# Altium PCB hd-gs-alt.PcbDoc
Units mil, origin at the board's own origin, x right, y up, seen from the top; angles counter-clockwise.
Board outline 1400 x 650 mil, 6 copper layers (Top, 2-GND, 3-SIG, 4-SIG, 5-GND, Bottom), stack 46.142 mil thick; 54 components, 39 nets, 207 pads, 109 vias.
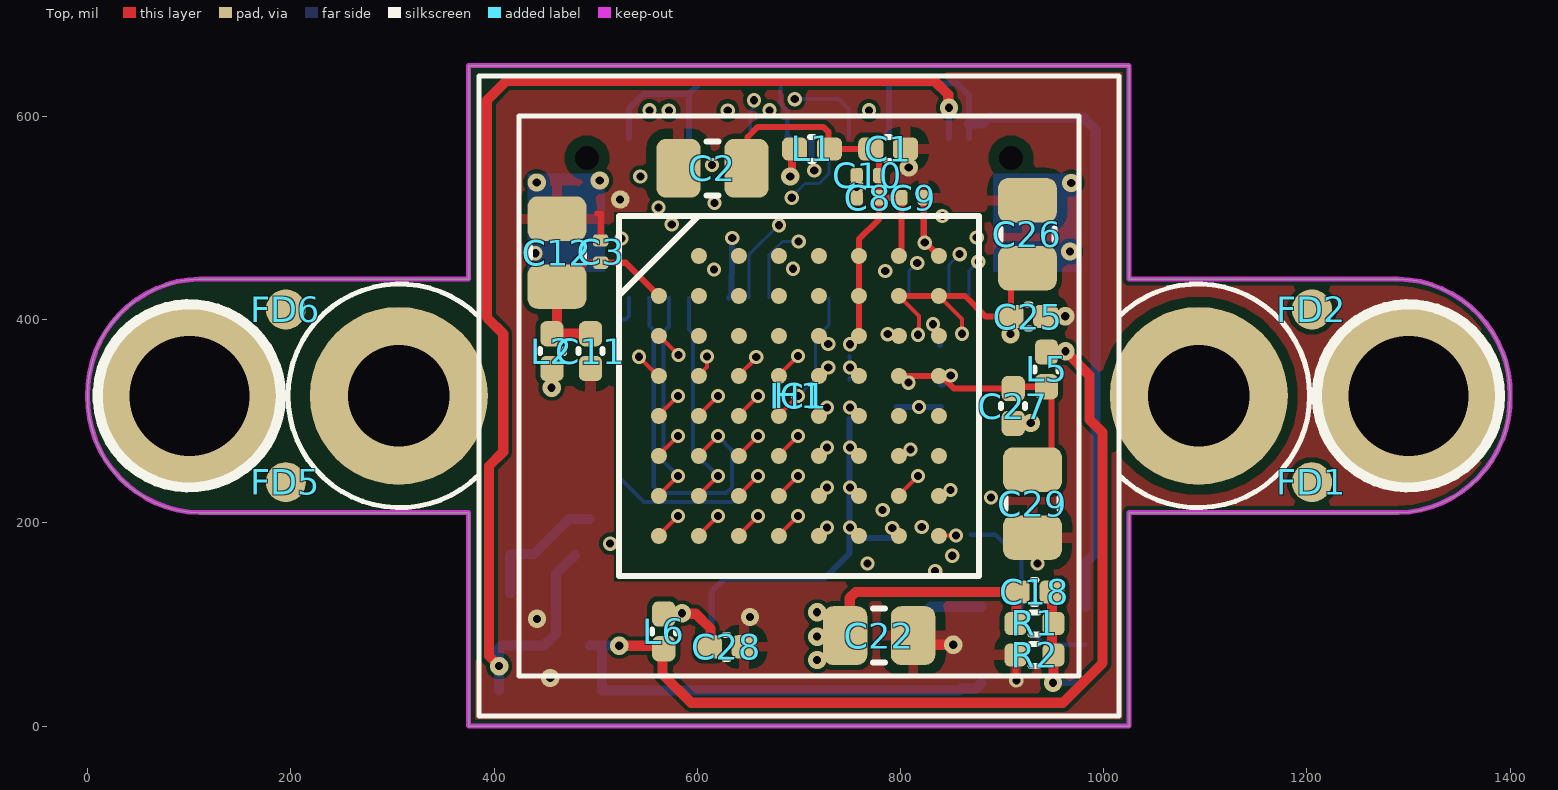
[diagram p0: Top view]
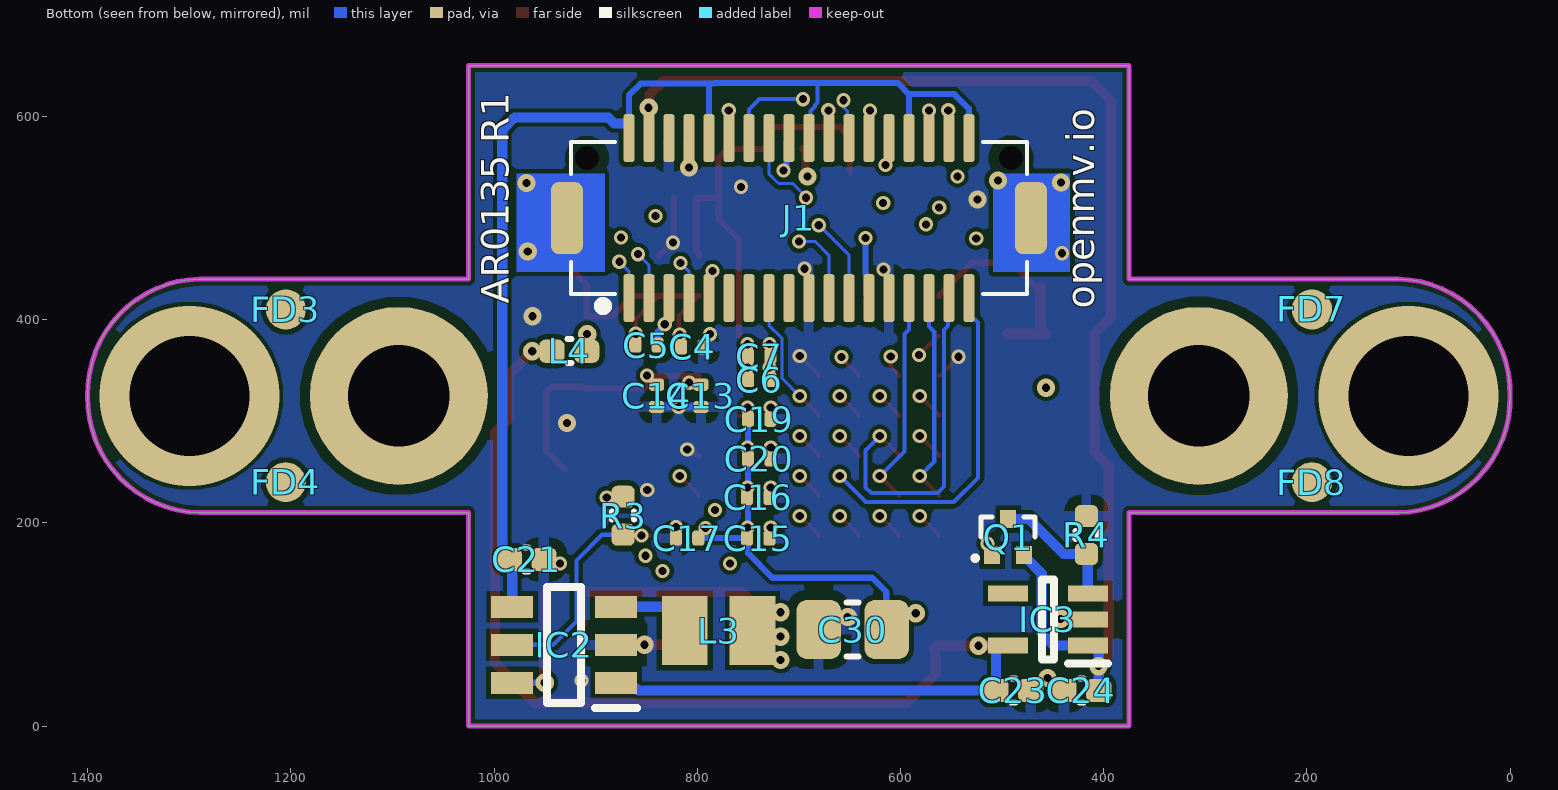
[diagram p1: Bottom view, seen from below]
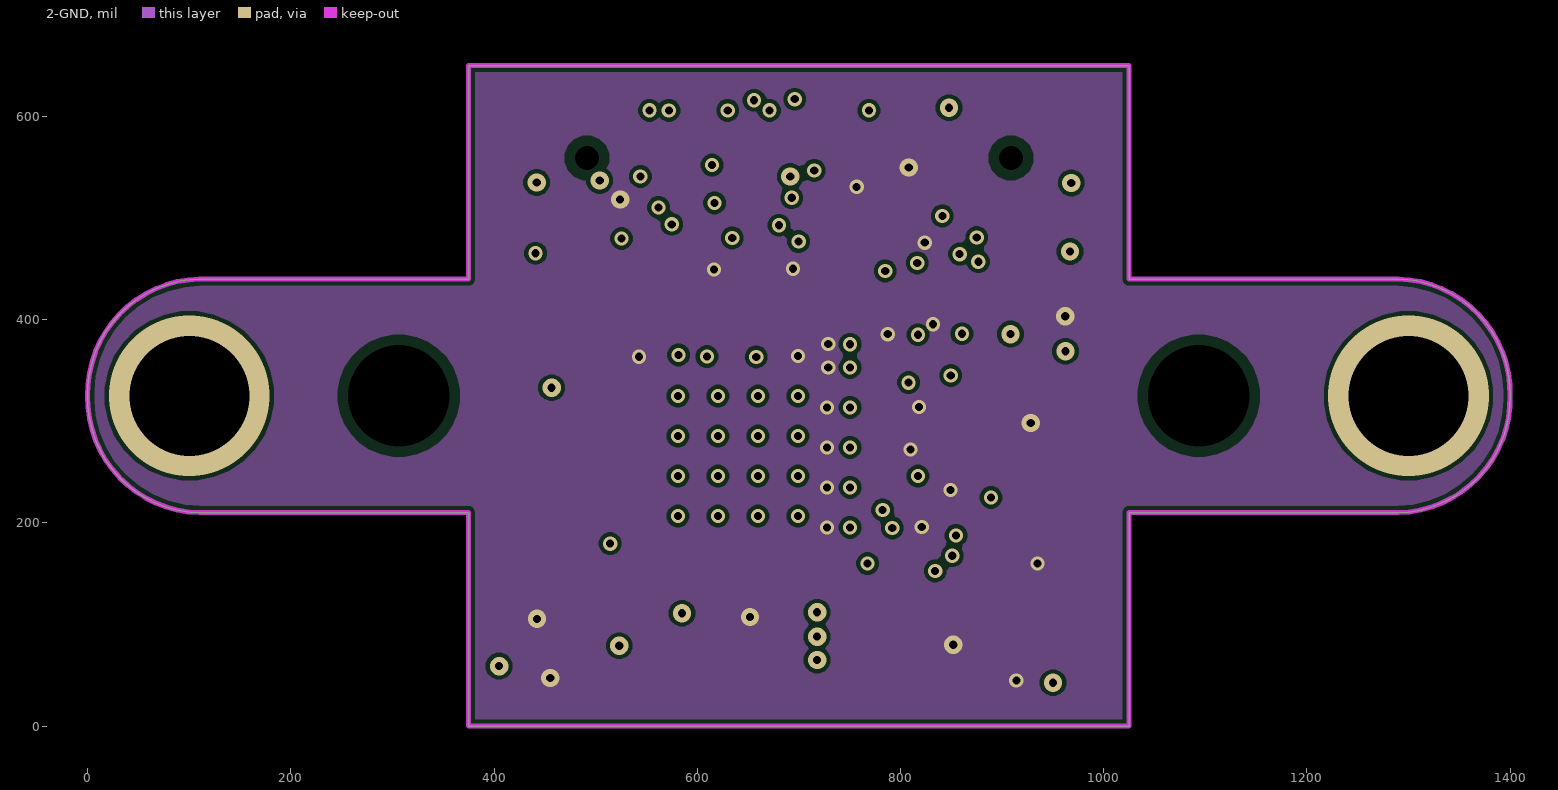
[diagram p2: 2-GND]
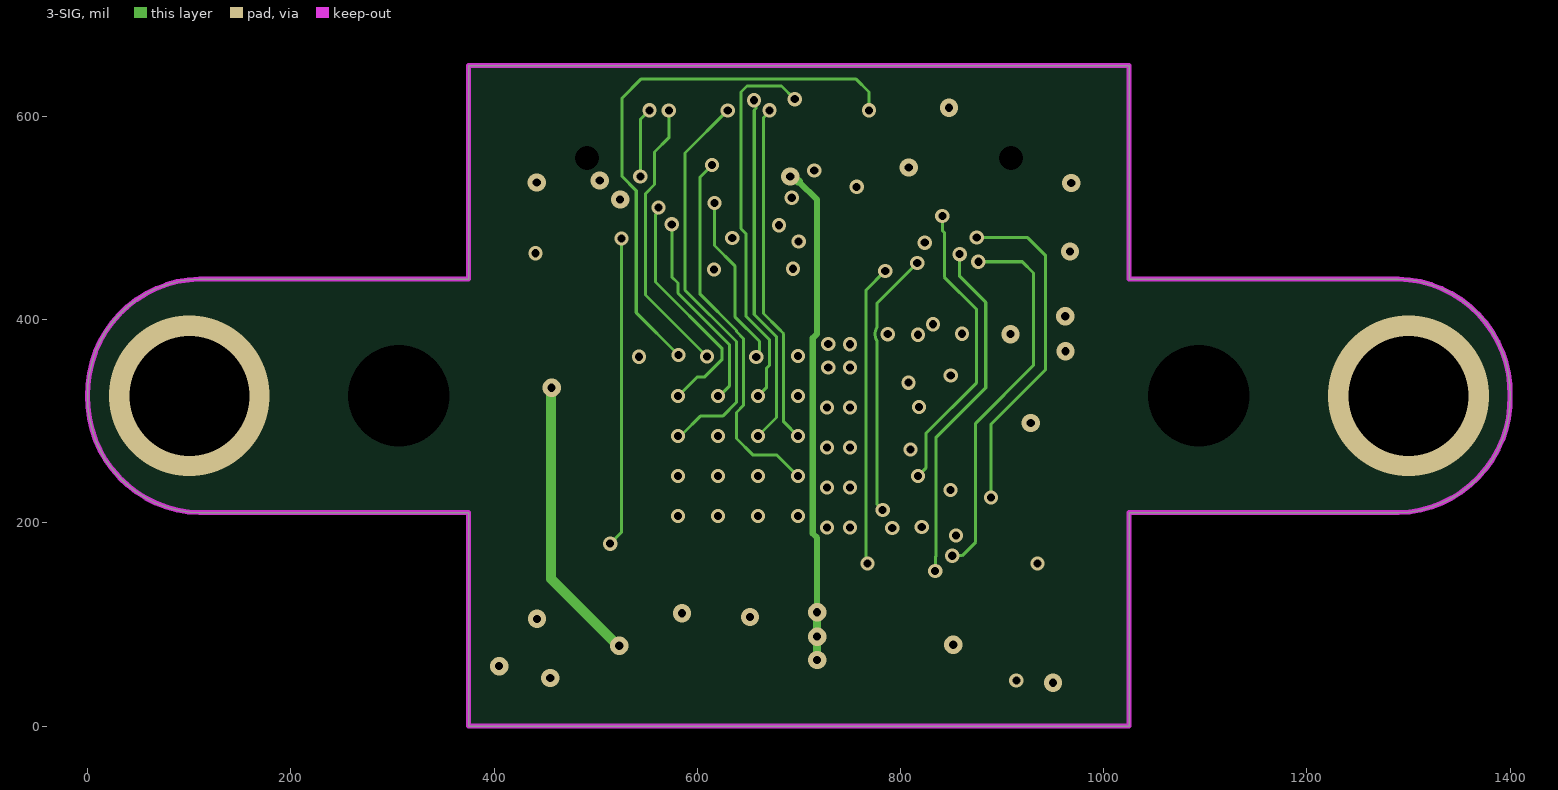
[diagram p3: 3-SIG]
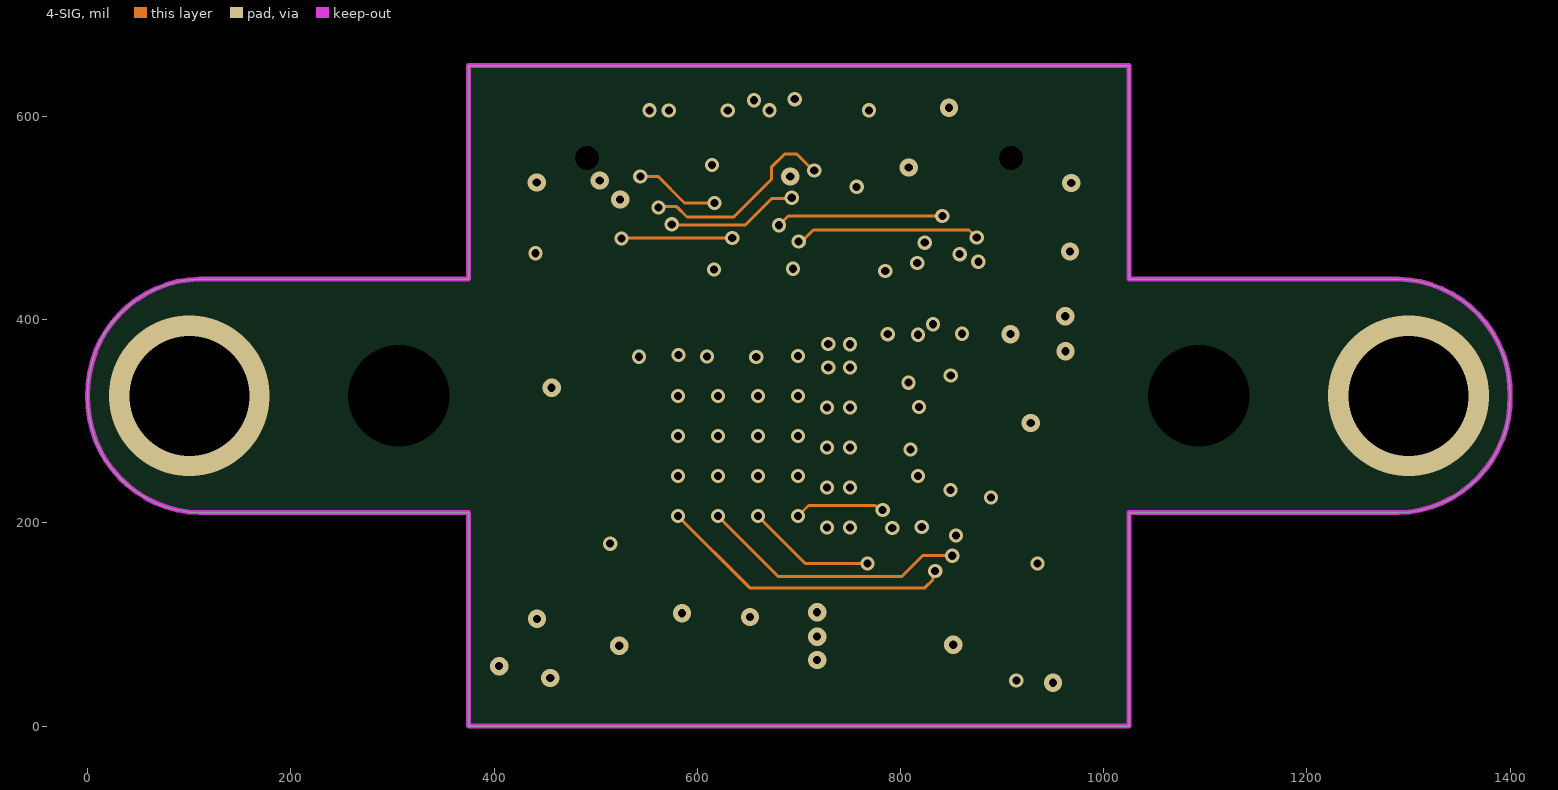
[diagram p4: 4-SIG]
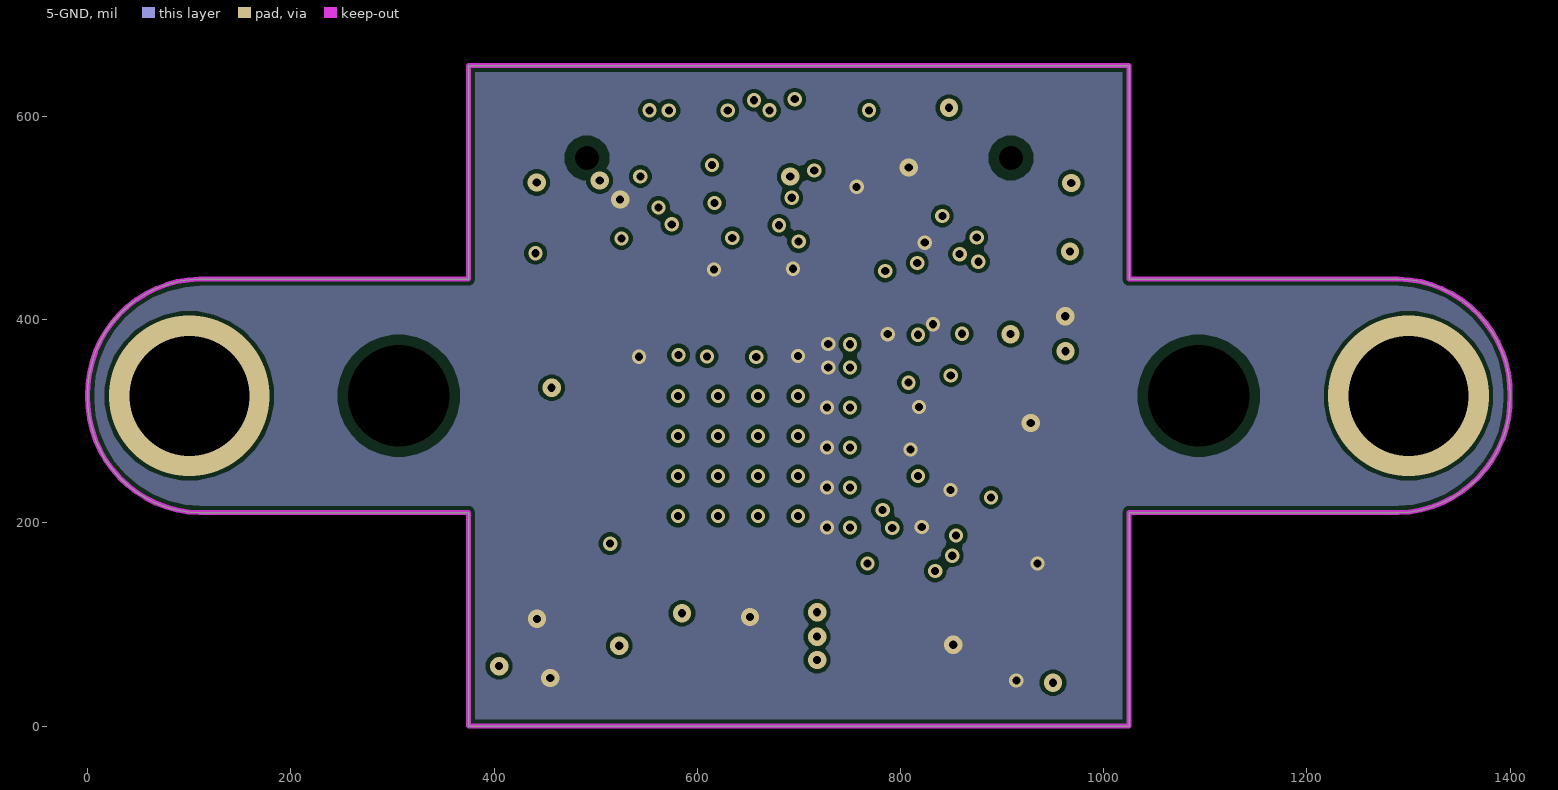
[diagram p5: 5-GND]
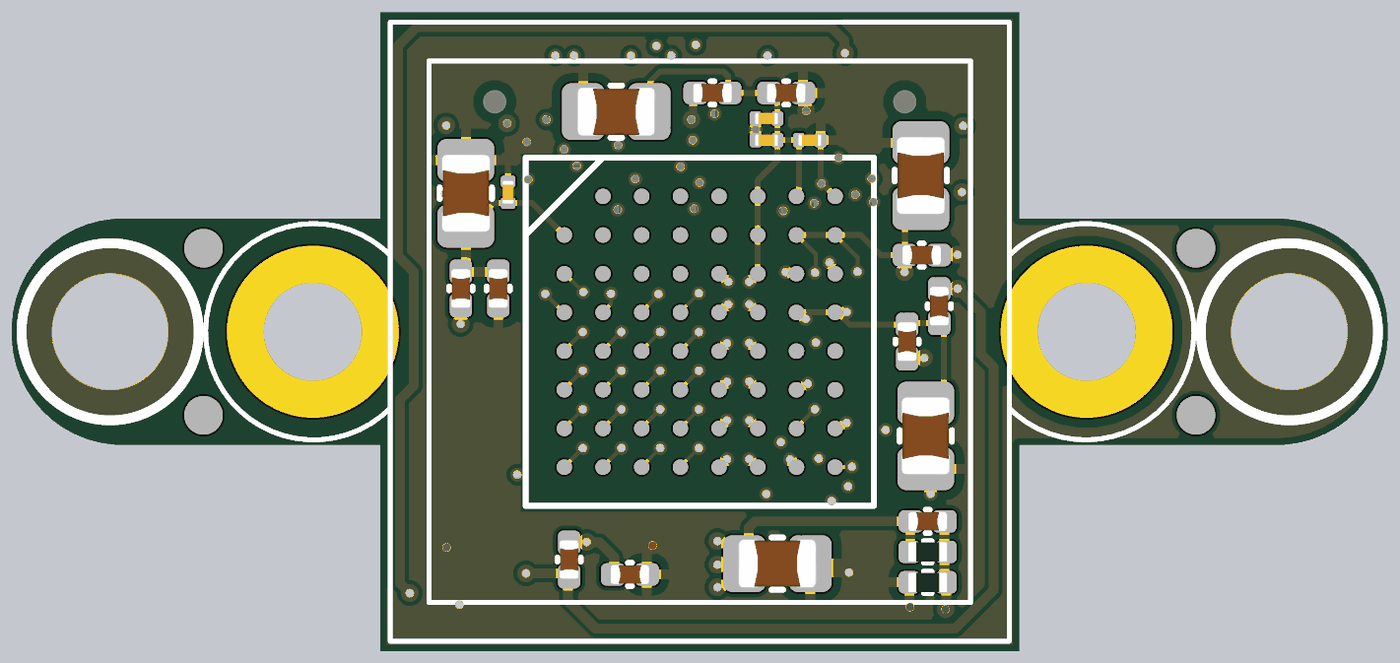
[diagram p6: 3D render of the assembled board from above, using the file's embedded part models]
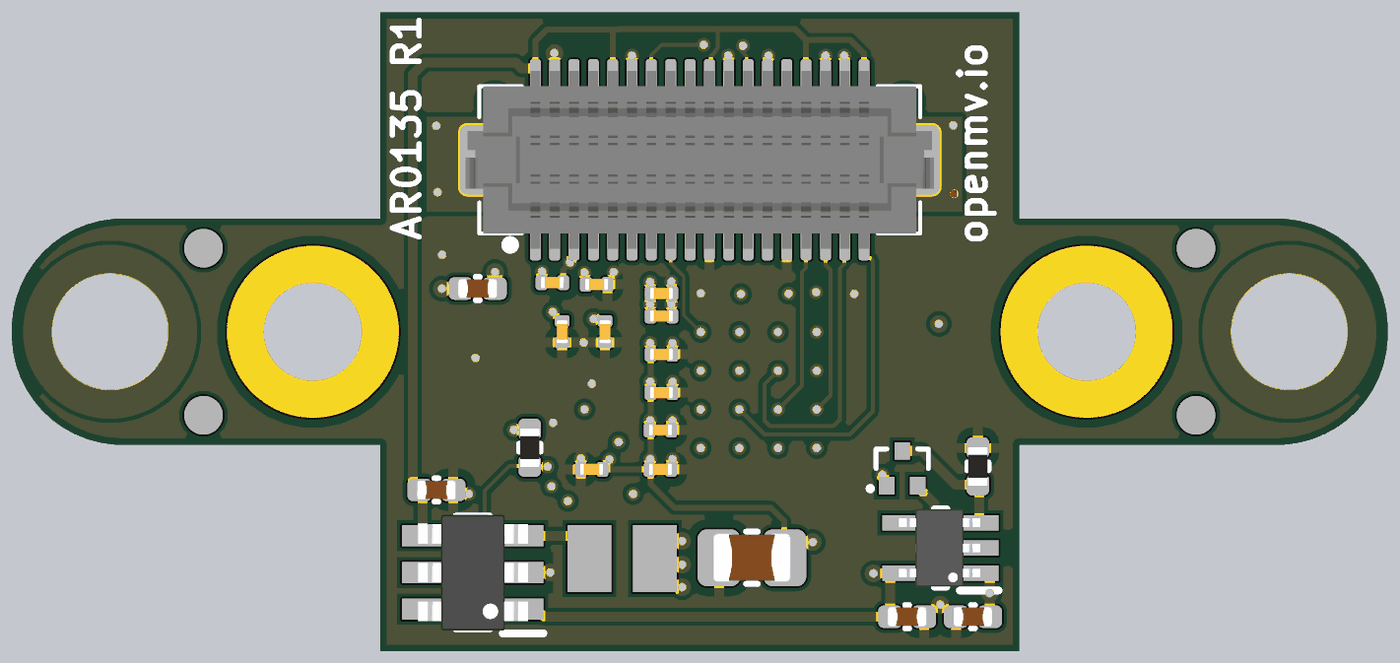
[diagram p7: 3D render of the assembled board from below, using the file's embedded part models]

## Layer stack, top to bottom
Top Solder: solder mask 0.4, Solder Resist, Dk 3.5
Top: signal copper 1.378
Dielectric 2: prepreg 5, PP-006, Dk 4.1
2-GND: signal copper 1.378
Dielectric 3: prepreg 10, PP-006, Dk 4.1
3-SIG: signal copper 1.378
Dielectric 1: dielectric 7.874, FR-4, Dk 4.8
4-SIG: signal copper 1.378
Dielectric 4: prepreg 10, PP-006, Dk 4.1
5-GND: signal copper 1.378
Dielectric 5: prepreg 5, PP-006, Dk 4.1
Bottom: signal copper 1.378
Bottom Solder: solder mask 0.4, Solder Resist, Dk 3.5

## Board outline
1290.03,210 1025.03,210 1025.03,0 375.03,0 375.03,210 110.03,210 cw(c112.53,322.5) 0.03,325 cw(c112.53,327.5) 110.03,440 375.03,440 375.03,650 1025.03,650 1025.03,440 1290.03,440 cw(c1287.53,327.5) 1400.03,325 cw(c1287.53,322.5)

## Design rules (kind name [scope] priority, off if disabled: settings)
BoardOutlineClearance mdCopperDimension [All] p1: gap=4 ignorepadtopadclearanceinfootprint=FALSE
Clearance [All] p1: gap=4 ignorepadtopadclearanceinfootprint=FALSE except(5: SMDPad-Fill SMDPad-Poly SMDPad-Region; 10: THPad-Fill THPad-Poly THPad-Region)
ComponentClearance ComponentClearance_1 [InComponent('H1')] p1: gap=0 collisioncheckmode=3 verticalgap=0 showdistances=FALSE
ComponentClearance [All] p2: gap=5 collisioncheckmode=3 verticalgap=5 showdistances=FALSE
HoleSize HoleSize_For_NetClass_signal [InNetClass('signal')] p1: absolutevalues=TRUE maxlimit=4 minlimit=4 maxpercent=80.000 minpercent=20.000
HoleSize HoleSize_For_NetClass_pwr [InNetClass('pwr')] p2: absolutevalues=TRUE maxlimit=4 minlimit=4 maxpercent=80.000 minpercent=20.000
HoleSize HoleSize_For_NetClass_gnd [InNetClass('gnd')] p3: absolutevalues=TRUE maxlimit=4 minlimit=4 maxpercent=80.000 minpercent=20.000
HoleSize [All] p4: absolutevalues=TRUE maxlimit=100000 minlimit=4 maxpercent=80.000 minpercent=20.000
HoleToHoleClearance mdDrill [All] p1: gap=3 allowstackedmicrovias=TRUE
MinimumSolderMaskSliver [All] p1 off: minsoldermaskwidth=10
PasteMaskExpansion Expansion_SMDPaste_OFF [InPadClass('SMDPaste_OFF')] p1: expansion=0
PasteMaskExpansion mlMinCreamFrame [All] p2: expansion=0
PolygonConnect [All] p1: thpad.connectstyle=Relief thpad.reliefconductorwidth=10 thpad.reliefentries=4 thpad.polygonreliefangle="90 Angle" thpad.airgapwidth=10 smdpad.connectstyle=Relief smdpad.reliefconductorwidth=10 smdpad.reliefentries=4 smdpad.polygonreliefangle="90 Angle" smdpad.airgapwidth=10 via.connectstyle=Direct via.reliefconductorwidth=10 via.reliefentries=4 via.polygonreliefangle="90 Angle" via.airgapwidth=10
RoutingVias [All] p1: holewidth=8 width=14 viastyle="Through Hole" minholewidth=8 minwidth=14 maxholewidth=100 maxwidth=100
SolderMaskExpansion mlMinStopFrame [All] p1: expansion=2 istentingtop=FALSE
Width [All] p1: maxlimit=196.85 minlimit=3 preferedwidth=3
25 further rules are at their usual default settings.

## Classes and differential pairs
pad class SMDPaste_OFF: FD1-1 FD2-1 FD3-1 FD4-1 FD5-1 FD6-1 FD7-1 FD8-1 J1-1 J1-2 J1-3 J1-4 J1-5 J1-6 J1-7 J1-8 J1-9 J1-10 J1-11 J1-12 J1-13 J1-14 J1-15 J1-16 J1-17 J1-18 J1-19 J1-20 J1-21 J1-22 J1-23 J1-24 J1-25 J1-26 J1-27 J1-28 J1-29 J1-30 J1-31 J1-32 J1-33 J1-34 J1-35 J1-36

## Components (designator, comment, footprint, x,y, rotation, side; value= is the part's Value field where it differs from the comment)
C1 "4.7uF" 0402 788,568 r180 top
C2 "22uF" 0805 615.03,549 r0 top
C3 "0.22uF" C0201 505,467 r90 top
C4 "0.22uF" C0201 804.93,373.27 r180 bottom
C5 "0.22uF" C0201 850.03,375 r180 bottom
C6 "0.22uF" C0201 739,341 r180 bottom
C7 "0.22uF" C0201 739,364 r180 bottom
C8 "0.22uF" C0201 768,520 r180 top
C9 "0.22uF" C0201 812,520 r0 top
C10 "0.22uF" C0201 768,542 r180 top
C11 "4.7uF" 0402 495,369 r90 top
C12 "22uF" 0805 462,466 r270 top
C13 "0.22uF" C0201 796.39,325 r270 bottom
C14 "0.22uF" C0201 840.03,325 r270 bottom
C15 "0.22uF" C0201 740.03,185 r180 bottom
C16 "0.22uF" C0201 740.03,225 r180 bottom
C17 "0.22uF" C0201 810,185 r0 bottom
C18 "6.8pF" 0402 932,132 r0 top
C19 "0.22uF" C0201 739,302 r180 bottom
C20 "0.22uF" C0201 739,263 r180 bottom
C21 "4.7uF" 0402 968,164 r0 bottom
C22 "22uF" 0805 779,89 r180 top
C23 "4.7uF" 0402 489,35 r0 bottom
C24 "4.7uF" 0402 422,35 r180 bottom
C25 "4.7uF" 0402 925.94,403.01 r180 top
C26 "22uF" 0805 925,484 r270 top
C27 "4.7uF" 0402 911,315 r90 top
C28 "4.7uF" 0402 629,78 r180 top
C29 "22uF" 0805 930,219 r90 top
C30 "22uF" 0805 647,95 r180 bottom
FD1 "FIDUCIAL1X2" FIDUCIAL-1X2 1205.03,240 r0 top
FD2 "FIDUCIAL1X2" FIDUCIAL-1X2 1205.03,410 r0 top
FD3 "FIDUCIAL1X2" FIDUCIAL-1X2 1205.03,410 r180 bottom
FD4 "FIDUCIAL1X2" FIDUCIAL-1X2 1205.03,240 r180 bottom
FD5 "FIDUCIAL1X2" FIDUCIAL-1X2 195.03,240 r0 top
FD6 "FIDUCIAL1X2" FIDUCIAL-1X2 195.03,410 r0 top
FD7 "FIDUCIAL1X2" FIDUCIAL-1X2 195.03,410 r180 bottom
FD8 "FIDUCIAL1X2" FIDUCIAL-1X2 195.03,240 r180 bottom
H1 "LENSMOUNT20MM" LENSMOUNT-20MM 700.03,325 r0 top locked
IC1 "AR0135CS2C00SUEA0" AR0135CS2C00SUEA0 700.03,325 r0 top locked
IC2 "TLV62568PDDCR" SOT95P280X110-6N 931,80 r0 bottom
IC3 "MIC5365-2.8YC5-TR" SOT65P210X110-5N 455.03,105 r0 bottom
J1 "DF12-36-DP" DF12-36-DP 700.03,500 r0 bottom locked
L1 "100" 0402 713,568 r180 top
L2 "100" 0402 457,369 r270 top
L3 "MAKK2016T2R2M" INDC2016X100N 779,94 r0 bottom
L4 "100" 0402 926,369 r0 bottom
L5 "100" 0402 943.79,351.05 r90 top
L6 "100" 0402 567.09,93.17 r270 top
Q1 "SSM3J15FV,L3F" SSM3J15FV 494,186 r180 bottom
R1 "200K" R0402 932,101 r180 top
R2 "100K" R0402 932,70 r180 top
R3 "10K" R0402 873,207 r90 bottom
R4 "100K" R0402 417,188 r90 bottom

## Footprints (in the part's own frame and the unit in brackets; to place one, negate y for a bottom-side part, rotate by r counter-clockwise, add the part's x,y. Pads: shape width x height; smd on the part's side, far side on the other; paste and mask are expansions set on the pad)
0402 [mm] "Chip Capacitor, 2-Leads, Body  0402 (in) 1005 (mm), IPC Medium Density"
  rrect52% 0.63x0.58 smd mask+0.05: 1(-0.435,0) 2(0.435,0)
  silkscreen extent -0.05,-0.3 0.05,0.3, body extent -0.5,-0.25 0.5,0.25, height 0.5
0805 [mm] "Chip Capacitor, Body 0805 imperial, 2.0x1.2mm, IPC Medium Density"
  rrect45% 1.11x1.47 smd: 1(-0.85,0) 2(0.85,0)
  silkscreen extent -0.15,-0.67 0.15,0.67, body extent -1,-0.62 1,0.63, height 1.25
AR0135CS2C00SUEA0 [mil] "AR0135CS2C00SUEA0"
  rrect100% 15.75x15.75 smd: P$1(-98.43,137.8) P$2(-59.06,137.8) P$3(-19.69,137.8) P$4(19.69,137.8) P$5(59.06,137.8) P$6(98.43,137.8) P$7(137.8,137.8) P$8(-137.8,98.43) P$9(-98.43,98.43) P$10(-59.06,98.43) P$11(-19.69,98.43) P$12(19.69,98.43) P$13(59.06,98.43) P$14(98.43,98.43) P$15(137.8,98.43) P$16(-137.8,59.06) P$17(-98.43,59.06) P$18(-59.06,59.06) P$19(-19.69,59.06) P$20(19.69,59.06) P$21(59.06,59.06) P$22(98.43,59.06) P$23(137.8,59.06) P$24(-137.8,19.69) P$25(-98.43,19.69) P$26(-59.06,19.69) P$27(-19.69,19.69) P$28(19.69,19.69) P$29(59.06,19.69) P$30(98.43,19.69) P$31(137.8,19.69) P$32(-137.8,-19.69) P$33(-98.43,-19.69) P$34(-59.06,-19.69) P$35(-19.69,-19.69) P$36(19.69,-19.69) P$37(59.06,-19.69) P$38(98.43,-19.69) P$39(137.8,-19.69) P$40(-137.8,-59.06) P$41(-98.43,-59.06) P$42(-59.06,-59.06) P$43(-19.69,-59.06) P$44(19.69,-59.06) P$45(59.06,-59.06) P$46(98.43,-59.06) P$47(137.8,-59.06) P$48(-137.8,-98.43) P$49(-98.43,-98.43) P$50(-59.06,-98.43) P$51(-19.69,-98.43) P$52(19.69,-98.43) P$53(59.06,-98.43) P$54(98.43,-98.43) P$55(137.8,-98.43) P$56(-137.8,-137.8) P$57(-98.43,-137.8) P$58(-59.06,-137.8) P$59(-19.69,-137.8) P$60(19.69,-137.8) P$61(59.06,-137.8) P$62(98.43,-137.8) P$63(137.8,-137.8)
  silkscreen extent -177,-177 177,177, body extent -177,-177 177,177, height 39
C0201 [mil] "0201 IPC-7351"
  rrect50% 12x15 smd mask+1.97: 1(-11,0) 2(11,0)
  body extent -12,-6 12,6, height 14
DF12-36-DP [mm] "36 Position Connector Receptacle, Center Strip Contacts Surface Mount Gold"
  rrect50% 0.8x1.8 smd mask+0.05: 0(-5.8,0) 0(5.8,0)
  rrect50% 0.28x1.2 smd mask+0.05: 1(4.25,2) 2(4.25,-2) 3(3.75,2) 4(3.75,-2) 5(3.25,2) 6(3.25,-2) 7(2.75,2) 8(2.75,-2) 9(2.25,2) 10(2.25,-2) 11(1.75,2) 12(1.75,-2) 13(1.25,2) 14(1.25,-2) 15(0.75,2) 16(0.75,-2) 17(0.25,2) 18(0.25,-2) 19(-0.25,2) 20(-0.25,-2) 21(-0.75,2) 22(-0.75,-2) 23(-1.25,2) 24(-1.25,-2) 25(-1.75,2) 26(-1.75,-2) 27(-2.25,2) 28(-2.25,-2) 29(-2.75,2) 30(-2.75,-2) 31(-3.25,2) 32(-3.25,-2) 33(-3.75,2) 34(-3.75,-2) 35(-4.25,2) 36(-4.25,-2)
  round 0 hole 0.6 unplated: MH1(-5.3,-1.5) MH2(5.3,-1.5)
  silkscreen extent -5.7,-1.9 5.7,2.3, body extent -6.05,-2.3 6.05,2.3, height 2.3
FIDUCIAL-1X2 [mm] "FIDUCIAL-1X2"
  rrect100% 1x1 smd paste+0: 1(0,0)
INDC2016X100N [mm] "INDC2016X100N"
  rect 1.14x1.73 smd: 1(-0.847,0) 2(0.847,0)
  body extent -1,-0.8 1,0.8, height 1
LENSMOUNT-20MM [mil] "LENSMOUNT-20MM"
  round 175 / inner round 0 / far side round 175 hole 100: P$1(-393.7,0) P$2(393.7,0)
  silkscreen extent -503,-315 503,315
R0402 [mm] "Chip Resistor, 2-Leads, Body  0402 (in) 1005 (mm), IPC Medium Density"
  rrect51% 0.55x0.58 smd mask+0.05: 1(-0.475,0) 2(0.475,0)
  silkscreen extent -0.1,-0.28 0.1,0.28, body extent -0.5,-0.25 0.5,0.25, height 0.34
SOT65P210X110-5N [mm] "SOT65P210X110-5N"
  rect 1x0.4 smd: 1(-1,0.65) 2(-1,0) 3(-1,-0.65) 4(1,-0.65) 5(1,0.65)
  silkscreen extent -1.5,-1 0.15,1.1, body extent -1.02,-1 1.07,1, height 0.96
SOT95P280X110-6N [mil] "SOT95P280X100-6N"
  rect 41.34x21.65 smd: 1(-51.18,37.4) 2(-51.18,0) 3(-51.18,-37.4) 4(51.18,-37.4) 5(51.18,0) 6(51.18,37.4)
  silkscreen extent -72,-57 17,62, body extent -56,-59 56,59, height 44
SSM3J15FV [mm]
  rect 0.4x0.45 smd: 1(-0.4,-0.45) 2(0.4,-0.45) 3(0,0.45)
  silkscreen extent -0.88,-0.58 0.67,0.5, body extent -0.6,-0.6 0.6,0.6, height 0.6

## Part data
C1 C11 C21 C23 C24 C25 C27 C28: library part CAP_0402, "0402 (1005 Metric) Nick Garner - TeleSense", MPN=JMK105BBJ475MV-F, DeviceSetName=CAP_0402, GateName_1=G$1, LibraryName=0402, SymbolName_1=CAP
C2 C12 C22 C26 C29 C30: library part 22UF-0805-6.3V-20%, "22ÂµF ceramic capacitors    A capacitor is a passive two-terminal electrical component used to store electrical energy temporarily in an electric field.", MPN=CL21A226MQQNNNE, DeviceName=-0805-6.3V-20%, DeviceSetName=22UF, GateName_1=G$1, LibraryName=SparkFun-Capacitors, PROD_ID=CAP-08402, SymbolName_1=CAP
C3 C4 C5 C6 C7 C8 C9 C10 C13 C14 C15 C16 C17 C19 C20: library part C-EUC0201, "CAPACITOR, European symbol", MPN=GRM033R60J224ME15D, DeviceName=C0201, DeviceSetName=C-EU, GateName_1=G$1, LibraryName=rcl, POPULARITY=0, SPICEPREFIX=C, SymbolName_1=C-EU
C18: library part CAP_0402, "0402 (1005 Metric) Nick Garner - TeleSense", MPN=GRM1555C1H6R8DA01D, DeviceSetName=CAP_0402, GateName_1=G$1, LibraryName=0402, SymbolName_1=CAP
FD1 FD2 FD3 FD4 FD5 FD6 FD7 FD8: "Fiducial Alignment Points    Point-of-reference for pick-and-place machines and other optical instruments.", DeviceName=1X2, DeviceSetName=FIDUCIAL, GateName_1=G$1, LibraryName=SparkFun-Aesthetics, SymbolName_1=FIDUCIAL
IC1: MPN=AR0135CS2C00SUEA0-DRBR, DeviceSetName=AR0135CS2C00SUEA0, GateName_1=G$1, LibraryName=AR0135CS2C00SUEA0, SymbolName_1=AR0135CS2C00SUEA0
IC2: "2.5V-5.5V input, 1A high efficiency step-down buck converter in SOT23 and SOT563 package   Source:  Datasheet", MANUFACTURER_NAME="Texas Instruments", DeviceSetName=TLV62568PDDCR, GateName_1=G$1, HEIGHT=1.1mm, LibraryName=TLV62568PDDCR, MANUFACTURER_PART_NUMBER=TLV62568PDDCR, MOUSER_PART_NUMBER=595-TLV62568PDDCR, MOUSER_PRICE-STOCK=https://www.mouser.co.uk/ProductDetail/Texas-Instruments/TLV62568PDDCR?qs=1mbolxNpo8f1FPchIXcxyQ%3D%3D, MPN=TLV62568PDDCR, SymbolName_1=TLV62568PDDCR
IC3: "IC REG LINEAR 2.8V 150MA SC70-5   Source:  Datasheet", MANUFACTURER_NAME=Microchip, DeviceSetName=MIC5365-2.8YC5-TR, GateName_1=G$1, HEIGHT=1.1mm, LibraryName=MIC5365-2.8YC5-TR, MANUFACTURER_PART_NUMBER=MIC5365-2.8YC5-TR, MOUSER_PART_NUMBER=998-MIC5365-2.8YC5TR, MOUSER_PRICE-STOCK=https://www.mouser.co.uk/ProductDetail/Microchip-Technology-Atmel/MIC5365-2.8YC5-TR?qs=U6T8BxXiZAX3mJDSWJyjVA%3D%3D, MPN=MIC5365-2.8YC5-TR, SymbolName_1=MIC5365-2.8YC5-TR
J1: MPN=DF12NB(3.0)-36DP-0.5V(51), DeviceSetName=DF12-36-DP, GateName_1=G$1, LibraryName=DF12NB(3.0)-36DP-0.5V(51), SymbolName_1=DF12-36
L1 L2 L4 L5 L6: library part INDUCTOR_0402, MPN=MFBM1V1005-101-R, DeviceSetName=INDUCTOR_0402, GateName_1=G$1, LibraryName=0402, SymbolName_1=INDUCTOR
L3: "INDUCTOR, METAL CORE Check availability", PACKAGE="2016 Taiyo Yuden", AVAILABILITY="In Stock", DeviceSetName=MAKK2016T2R2M, GateName_1=G$1, LibraryName=MAKK2016T2R2M, MF="Taiyo Yuden", MP=MAKK2016T2R2M, MPN=MAKK2016T2R2M, PRICE=None, PURCHASE-URL=https://pricing.snapeda.com/search/part/MAKK2016T2R2M/?ref=eda, SymbolName_1=MAKK2016T2R2M
Q1: library part PMXB120EPEZ, "MOSFET 30 V, P-channel Trench MOSFET   Source:  Datasheet", DeviceSetName=SSM3J15FV,L3F, GateName_1=G$1, HEIGHT=0.4mm, LibraryName=SSM3J15FV,L3F, MANUFACTURER_PART_NUMBER=SSM3J15FV,L3F, MPN=SSM3J15FV,L3F, SymbolName_1=SSM3J15FV,L3F
R1: library part R-US_R0402, "RESISTOR, American symbol", MPN=CRCW0402200KFKEDC, DeviceName=R0402, DeviceSetName=R-US_, GateName_1=G$1, LibraryName=rcl, POPULARITY=34, SPICEPREFIX=R, SymbolName_1=R-US
R2 R4: library part R-US_R0402, "RESISTOR, American symbol", MPN=AC0402FR-07100KL, DeviceName=R0402, DeviceSetName=R-US_, GateName_1=G$1, LibraryName=rcl, POPULARITY=34, SPICEPREFIX=R, SymbolName_1=R-US
R3: library part R-US_R0402, "RESISTOR, American symbol", MPN=AC0402FR-1310KL, DeviceName=R0402, DeviceSetName=R-US_, GateName_1=G$1, LibraryName=rcl, POPULARITY=34, SPICEPREFIX=R, SymbolName_1=R-US
H1: DeviceName=20MM, DeviceSetName=LENSMOUNT, GateName_1=G$1, LibraryName=lensmount, SymbolName_1=LENS

## Via types
v1: diameter 14, hole 8, Top to Bottom, tented both sides, 83 vias
v2: diameter 18, hole 8, Top to Bottom, tented both sides, 24 vias
v3: diameter 177.17/158.11/158.11/158.11/158.11/177.17 (per signal layer), hole 118.11, Top to Bottom, 2 vias

## Nets (pads, with @x,y where several pads share a name; then routed paths per layer and width w, separated by ;. In a path a pad name is that pad's centre, name@x,y a point inside that pad or via, vN(x,y) a via of type N, cw(c..) or ccw(c..) an arc to the next point about the centre after c; other vN are vias at no path point)
DCMI_CLK: IC1.P$16 J1.12 | length 577.2
  Top w4: IC1.P$16 562.89,384.06 v1(581.66,365.29)
  3-SIG w3: v1(581.66,365.29) 540,406.95 540,527 526,541 526,618 545,637 756,637 769,624 v1(769,606)
DCMI_D0: IC1.P$56 J1.3 | length 711.1
  Top w4: IC1.P$56 562.23,187.86 v1(581,206.63)
  3-SIG w3: v1(834.21,152.75) 834.5,153.04 834.5,166.72 834.89,167.11 834.89,283.89 884,333 884,417 858.31,442.69 v1(858.31,464.48)
  4-SIG w3: v1(581,206.63) 651.63,136 824,136 831.57,143.57 831.57,144.2 832.1,144.73 832.1,150.64 v1(834.21,152.75)
  Bottom w3: J1.3 847.67,453.83 v1(858.31,464.48)
DCMI_D1: IC1.P$57 J1.1 | length 706.7
  Top w4: IC1.P$57 601.6,187.86 v1(620.37,206.63)
  3-SIG w3: v1(851.01,167.67) 851.09,167.75 860.75,167.75 874,181 874,298 931,355 931,446 920,457 876.75,457 v1(876.7,456.94)
  4-SIG w3: v1(620.37,206.63) 680,147 801,147 821.67,167.67 v1(851.01,167.67)
  Bottom w3: J1.1 867.38,447.62 v1(876.7,456.94)
DCMI_D2: IC1.P$58 J1.9 | length 451.1
  Top w4: IC1.P$58 640.97,187.86 v1(659.74,206.63)
  3-SIG w3: v1(767.71,159.93) 766.04,161.6 766.04,429.04 v1(785,448)
  4-SIG w3: v1(659.74,206.63) 706.44,159.93 v1(767.71,159.93)
DCMI_D3: IC1.P$59 J1.7 | length 417.3
  Top w4: IC1.P$59 680.34,187.86 v1(699.11,206.63)
  3-SIG w3: v1(782.51,212.68) 777,218.19 777,379.05 cw(c787.57,385.72) 777,392.38 777,416.3 v1(816.56,455.85)
  4-SIG w3: v1(699.11,206.63) 709.48,217 775.25,217 779.57,212.68 v1(782.51,212.68)
  Bottom w3: J1.7 808.33,447.62 v1(816.56,455.85)
DCMI_D4: IC1.P$48 J1.31 | length 209.1
  Top w4: IC1.P$48 562.23,227.23 v1(581,246)
  Bottom w4: J1.31 572.08,393.07 566.77,387.77 566.77,260.23 v1@580,247
DCMI_D5: IC1.P$49 J1.29 | length 214.3
  Top w4: IC1.P$49 601.6,227.23 v1(620.37,246)
  Bottom w4: J1.29 591.76,390.24 596,386 596,270.37 v1(620.37,246)
DCMI_D6: IC1.P$50 J1.35 | length 365.8
  Top w4: IC1.P$50 640.97,227.23 v1(659.74,246)
  Bottom w4: J1.35 532.7,403.56 529.25,400.1 526.58,400.1 523.87,397.4 523.87,244.13 547.58,220.42 634.16,220.42 v1(659.74,246)
DCMI_D7: IC1.P$51 J1.28 | length 397.6
  Top w4: IC1.P$51 680.34,227.23 v1(699.11,246)
  3-SIG w3: v1(614.68,552.16) 602.93,540.41 602.93,424.9 638.59,389.24 638.59,388.31 645.59,381.31 645.59,315.69 638.59,308.69 638.59,283.07 654.65,267 678.11,267 v1(699.11,246)
DCMI_D8: IC1.P$40 J1.26 | length 424.3
  Top w4: IC1.P$40 562.23,266.6 v1(581,285.37)
  3-SIG w3: v1(581,285.37) 582.62,285.37 585.22,287.96 585.96,287.96 603,305 625,305 638.59,318.59 638.59,378.41 588,429 588,563.98 v1(630,605.98)
DCMI_D9: IC1.P$41 J1.33 | length 353.2
  Top w4: IC1.P$41 601.6,266.6 v1(620.37,285.37)
  Bottom w4: J1.33 553.02,420.63 553.02,393.98 557.18,389.82 557.18,235.63 563.59,229.22 628.55,229.22 634.3,234.97 634.3,271.44 v1(620.37,285.37)
DCMI_D10: IC1.P$42 J1.24 | length 411
  Top w4: IC1.P$42 640.97,266.6 v1(659.74,285.37)
  3-SIG w3: v1(659.74,285.37) 678.05,303.71 678.05,383.19 656.13,405.11 656.13,606.08 657.9,607.85 657.9,610.82 v1@660,612.93
  Bottom w3: J1.24 652.18,580.1 652.18,605.1 v1@660,612.93
  other v1: 656,616
DCMI_D11: IC1.P$43 J1.22 | length 364.2
  Top w4: IC1.P$43 680.34,266.6 v1(699.11,285.37)
  3-SIG w3: v1(671,606) 671,604.45 665.3,598.74 665.3,406.12 680.35,391.07 680.35,390.97 684.48,386.84 684.48,386.66 685.05,386.09 685.05,299.43 v1(699.11,285.37)
DCMI_FSIN: IC1.P$54 J1.23 | length 570
  Top w4: IC1.P$54 798.46,227.23 v1(817.23,246)
  3-SIG w3: v1(817.23,246) 825,253.77 825,288 875,338 875,410 843.16,441.84 843.16,485.74 841.23,487.68 v1(841.23,502.1)
  4-SIG w3: v1(680.5,492.98) 689.62,502.1 v1(841.23,502.1)
  Bottom w3: J1.23 650.82,463.82 679.98,492.98 v1(680.5,492.98)
DCMI_HSYNC: IC1.P$32 J1.18 | length 494.9
  Top w4: IC1.P$32 562.23,305.97 v1(581,324.74)
  3-SIG w3: v1(561.93,510.5) 559.83,508.4 559.83,504.07 559,503.25 559,437 624.59,371.41 624.59,361.04 606.97,343.43 599.69,343.43 v1(581,324.74)
  4-SIG w3: v1(561.93,510.5) 562.63,511.21 579.79,511.21 590,501 636,501 673,538 673,550 686,563 698,563 714.14,546.86 v1(715.18,546.86)
  Bottom w6: J1.18 712.38,576.23 712.38,551.83 715.18,549.03 v1(715.18,546.86)
DCMI_PCLK: IC1.P$34 J1.14 | length 489.1
  Top w4: IC1.P$34 640.97,305.97 v1(659.74,324.74)
  3-SIG w3: v1(659.74,324.74) 668,333 668,352 671.04,355.04 671.04,380.3 648,403.34 648,484.59 643,489.59 643,624 649,630 683,630 v1(696,617)
  Bottom w4: v1(696,617) 739,617 749.24,606.76 J1.14
DCMI_PWDN: J1.25 Q1.1 | length 474.8
  3-SIG w3: v1(514.3,179.53) 525.47,190.69 v1(525.47,479.9)
  4-SIG w3: v1(525.47,479.9) 526.07,480.5 v1(634.41,480.5)
  Bottom w6: J1.25 633.64,423.77 633.64,444.63 634.41,445.4 v1(634.41,480.5)
DCMI_PWDN_INT: IC3.3 Q1.3 R4.1 | length 130.5
  Bottom w10: IC3.3 415.66,167.96 R4.1 439.3,169.3 473.72,203.72 Q1.3
DCMI_RST: J1.21 R3.2 | length 595.7
  3-SIG w3: v1(875.07,480.76) 925.24,480.76 943,463 943,351 889.15,297.15 v1(889.15,225.08)
  4-SIG w3: v1(699.83,476.87) 702.81,476.87 714.25,488.31 867.52,488.31 v1(875.07,480.76)
  Bottom w3: J1.21 670.5,463.5 683.87,476.87 v1(699.83,476.87)
DCMI_SCL: IC1.P$25 J1.32 | length 299.2
  Top w4: IC1.P$25 601.6,345.35 609.57,353.32 v1(609.57,363.71)
  3-SIG w3: v1(572.06,605.97) 572,605.91 572,579 558,565 558,533 549,524 549,424.28 v1(609.57,363.71)
DCMI_SDA: IC1.P$26 J1.34 | length 349.6
  Top w4: IC1.P$26 640.97,345.35 658.09,362.47 v1(658.09,363.35)
  3-SIG w3: v1(544,541) 544,597 v1(553,606) ; v1(617.05,514.9) 617.05,472.95 637,453 637,403 661.36,378.64 661.36,369.6 658.09,366.33 v1(658.09,363.35)
  4-SIG w3: v1(544,541) 561.38,541 587.48,514.9 v1(617.05,514.9)
DCMI_VSYNC: IC1.P$33 J1.16 | length 436.9
  Top w4: IC1.P$33 601.6,305.97 v1(620.37,324.74)
  3-SIG w3: v1(574.9,493.83) 575,493.73 575,442 581,436 581,426.1 631.59,375.51 631.59,334.59 621.74,324.74 v1(620.37,324.74)
  4-SIG w3: v1(574.9,493.83) 575.73,493 646.99,493 673.07,519.08 692.08,519.08 v1(693,520)
  Bottom w3: v1(693,520) 693,521 706,534 720,534 729.56,543.56 J1.16
FB: C18.2 IC2.6 R1.1 R2.1 | length 122.3
  Top w10: C18.2 949.13,71.57 R2.1 950.7,43.15 v2(950.18,42.63)
  Bottom w6: v2(950.18,42.63) IC2.6
GND: C1.1 C2.1 C3.2 C4.2 C5.2 C6.2 C7.2 C8.2 C9.2 C10.2 C11.1 C12.1 C13.2 C14.2 C15.2 C16.2 C17.2 C19.2 C20.2 C21.1 C22.1 C23.1 C24.1 C25.1 C26.1 C27.1 C28.1 C29.1 C30.1 IC1.P$7 IC1.P$20 IC1.P$22 IC1.P$23 IC1.P$24 IC1.P$27 IC1.P$28 IC1.P$36 IC1.P$44 IC1.P$46 IC1.P$52 IC1.P$55 IC1.P$60 IC2.2 IC3.2 J1.5 J1.6 J1.8 J1.19 J1.27 R2.2 R4.2 | length 297.8
  Top w4: v1(542.8,363.46) 561.57,344.69 IC1.P$24 ; IC1.P$27 680.34,345.35 v1(699.11,364.12) ; IC1.P$44 IC1.P$44@719.72,266.6
  Top w6: 501.33,504.46 505,504.46 C3.2 ; IC1.P$46 v1(809.85,272.12) ; C9.2 823,476.72 v1(823.95,475.77) 824.86,475.77 IC1.P$7 ; R2.2 913.3,46.68 914.09,45.89 v1(914.09,44.81)
  Top w10: C22.1 821.46,80 v2(852,80)
  Bottom w6: C13.2 C14.2 ; v1(832.08,395.44) 832.08,395.18 839.03,388.23 C5.2
  other v1: 935,160 727.72,195.3 821,196 849.28,232.3 727.72,234.67 727.72,274.04 727.72,313.41 818.21,314 729,352.83 729,376 787.57,385.72 616.62,449.27 694.35,450.16 756.91,530.75
  other v2: 455.4,47.24 442.39,105.49 652.02,107.42 928.28,298.33 962.25,403.39 524.11,518.19 808.24,549.67
RESET_N: IC1.P$63 IC2.5 R3.1 | length 210.3
  Top w4: IC1.P$63 838.25,187.63 v1(854.81,187.63)
  Bottom w4: R3.1@869,188.3 893.7,188.3 919,163 919,103 942,80 IC2.5
SPI_MISO: IC1.P$35 J1.15 | length 136.3
  Top w4: IC1.P$35 680.34,305.97 v1(699.11,324.74)
  Bottom w3: v1(699.11,324.74) 716.44,342.07 716.44,381.44 729.56,394.56 J1.15
SPI_MOSI: J1.17
SPI_SCLK: J1.13
SPI_SSEL: J1.11
SW: IC2.3 L3.2 | length 80.7
  Bottom w10: L3.2 812.35,99.96 829.79,117.4 IC2.3
VAA: C4.1 C5.1 C25.2 C26.2 IC1.P$14 IC1.P$15 L4.1 | length 266.6
  Top w4: IC1.P$14 818.26,403.63 818.26,386.12 v1(817.3,385.16) ; IC1.P$15 860.56,400.7 v1(860.56,386.14)
  Top w6: IC1.P$14 IC1.P$15 863.57,423.43 883.99,403.01 C25.2 908.81,434.35 C26.2
  other v2: 908.39,385.77
VAA_PIX: C13.1 C14.1 C27.2 C29.2 IC1.P$30 IC1.P$31 L5.1 | length 256.6
  Top w6: IC1.P$30 840.26,344.69 852.82,332.13 C27.2 912.8,333.93 L5.1 948.66,329.06 948.66,270.79 930.33,252.46 C29.2
  Bottom w6: C14.1 841.53,336 844.53,339 844.53,339.53 849.56,344.57 v1(849.56,345.05)
  other v1: 808,338
VCC: C21.2 IC2.4 J1.2 J1.10 J1.20 J1.30 J1.36 | length 1181
  Bottom w4: 681.83,633 681.83,613.56 684,611.38 684,610 688.6,605.4 J1.20@688.6,580.33
  Bottom w6: J1.36 532.7,607.7 546.97,621.97 591.76,621.97 ; J1.30 591.76,621.97 ; J1.20@688.6,580.33 J1.20 ; 782.66,633 681.83,633 602.79,633 591.76,621.97 ; 783.34,632.32 788.61,632.32 ; J1.10 788.61,632.32 ; J1.2 867.35,592.59 867.35,620.81 855.84,632.32 788.61,632.32
  Bottom w10: J1.2@867.35,592.59 867.86,593.11 881.72,593.11 887.61,599 980,599 992,587 992,170.87 991.95,170.82 991.95,170.35 985.6,164 C21.2 982.18,161.05 IC2.4
VDD: C1.2 C2.2 C6.1 C7.1 C8.1 C9.1 C10.1 IC1.P$5 IC1.P$6 IC1.P$13 IC1.P$21 IC1.P$29 L1.1 | length 457.1
  Top w6: C2.2@649.49,545 649.49,579.49 659.77,589.77 724.23,589.77 729.1,584.9 729.1,569.03 L1.1 C1.2 770.87,567.39 779,559.27 C10.1 C8.1 ; IC1.P$21 IC1.P$13 IC1.P$5 759.09,479.09 779,499 C8.1 ; IC1.P$6 798.46,465.44 801,467.98 C9.1 C8.1
  Bottom w4: C6.1 C6.1@750,342.33 ; C7.1@750,362.44 C7.1
  other v1: 750.47,352.99 750.47,375.76
VDD_PLL: C3.1 C11.2 C12.2 IC1.P$8 L2.1 | length 209.9
  Top w6: C12.2 467.12,432.54 490.58,456 C3.1 529.66,456 IC1.P$8
  Top w10: C12.2 462,391.13 L2.1 C11.2
VDD_REG: C18.1 C22.2 L1.2 L3.1 R1.2 | length 759.3
  Top w8: v2(691.54,540.94) 693.45,542.86 693.45,565.58 L1.2
  Top w10: C22.2 750.08,93.54 750.08,126.14 755.94,132 C18.1 914.09,131.21 914.09,101.79 R1.2
  3-SIG w6: 700.06,535.94 718,518 718,386.04 713.72,381.76 713.72,189.5 718,185.22 v2@718,114.71
  3-SIG w8: v2(691.54,540.94) 694.24,540.94 699.24,535.94 700.06,535.94 ; v2(718,65) v2(718,88) v2(718,112) v2@718,114.71
VDDA: C24.2 IC3.1 J1.4 Q1.2 | length 1273.2
  Top w10: v2(405,59) 395,69 395,256 409,270 409,386 393,402 393,616 411.8,634.8 833.84,634.8 847.02,621.62 847.02,609.39 v2(847.88,608.53)
  Bottom w6: J1.4 847.77,578.85 847.77,608.43 v2(847.88,608.53)
  Bottom w10: C24.2 404.87,76.53 407.75,79.41 IC3.1 449.41,79.41 461,91 461,150.04 476.37,165.41 477.35,165.41 479.24,167.29 Q1.2@479.24,168.28
VDDIO: C15.1 C16.1 C17.1 C19.1 C20.1 C28.2 C30.2 IC1.P$37 IC1.P$45 IC1.P$53 IC1.P$61 IC1.P$62 L6.1 | length 423.1
  Top w4: IC1.P$37@758.43,305.31 IC1.P$37
  Top w10: v2(585,111) 585.47,110.53 598.47,110.53 613,96 613,79.13 C28.2
  Bottom w6: C30.2 614,95.46 614,132 628,146 726,146 750,170 750,183.97 C15.1 ; C19.1 C20.1 750,186.03 C15.1 ; C17.1 C15.1
  other v1: 750.47,195.5 792,195 750.47,234.87 750.47,274.24 750.47,313.61
VDDIO_REG: C23.2 IC2.1 IC3.5 L2.2 L4.2 L5.2 L6.2 | length 1585.7
  Top w10: v2(523.23,79.08) 564.05,79.08 L6.2 ; L6.2@565.85,75.97 565.85,51.15 594,23 960,23 999,62 999,289 986,302 986,345.33 v2(962.43,368.9)
  3-SIG w10: v2(456.71,332.96) 456,332.25 456,145 v2@522,79
  Bottom w10: IC3.5 494.56,79.25 IC3.5@503.42,79.25 ; v2(523.23,79.08) 523.07,79.25 IC3.5@503.42,79.25 ; IC2.1 874,36.77 860.07,36.77 858.29,35 C23.2 506.13,76.53 IC3.5@503.42,79.25
pads on no net: FD1.1 FD2.1 FD3.1 FD4.1 FD5.1 FD6.1 FD7.1 FD8.1 H1.P$1 H1.P$2 IC1.P$1 IC1.P$2 IC1.P$3 IC1.P$4 IC1.P$9 IC1.P$10 IC1.P$11 IC1.P$12 IC1.P$17 IC1.P$18 IC1.P$19 IC1.P$38 IC1.P$39 IC1.P$47 IC3.4 J1.0 J1.MH1 J1.MH2
copper on no net:
  other v1: 440.94,465.36
  other v2: 966.89,467.06 442,535 968.09,534.55 504,537
  other v3: 100.03,325 1300.03,325

## Polygon pours and split planes (outlines as drawn)
GND on 2-GND "GND_L02_P000" (solid, remove dead copper, pour order 0): 0,650 1400,650 1400,0 0,0
GND on 5-GND "GND_L05_P001" (solid, remove dead copper, pour order 1): 0,650 1400,650 1400,0 0,0
GND on Bottom "GND_L06_P002" (solid, remove dead copper, pour order 2): 0,650 1400,650 1400,0 0,0
GND on Top "GND_L01_P003" (solid, remove dead copper, pour order 3): 0,650 1400,650 1400,0 0,0

## Keep-outs
Keep-Out Layer:
  the board outline again, w5

## Other copper
Top:
  pour cut-out: 518,506 518,142 883,142 883,506 520,506
Bottom:
  region: 978,544 891.06,544 891.06,447 978,447
  rectangle: 433,447 509,544

## Silkscreen, mask and mechanical layers (free items; w line width, h text height)
Top Overlay:
  circle w10: c100.03,325 r90.14
  circle w10: c1300.03,325 r90.14
Bottom Overlay:
  text "AR0135 R1" at 985.34,415.44 h27.2 r270
  text "openmv.io" at 409.4,410.91 h27.2 r270
Dimension:
  lines w3.94: 1491.56,-89.27 1597.73,-89.27 1803,-89.27 1954.51,-89.27 ; 1491.56,-38.52 1597.73,-38.52 1803,-38.52 1954.51,-38.52 ; 1491.56,12.23 1597.73,12.23 1803,12.23 1954.51,12.23 ; 1491.56,62.98 1597.73,62.98 1803,62.98 1954.51,62.98 ; 1491.56,113.74 1597.73,113.74 1803,113.74 1954.51,113.74 ; 1491.56,164.49 1597.73,164.49 1803,164.49 1954.51,164.49 ; 1491.56,215.24 1597.73,215.24 1803,215.24 1954.51,215.24 ; 1491.56,265.99 1597.73,265.99 1803,265.99 1954.51,265.99 ; 1491.56,316.74 1597.73,316.74 1803,316.74 1954.51,316.74 ; 1491.56,367.5 1597.73,367.5 1803,367.5 1954.51,367.5 ; 1491.56,418.25 1597.73,418.25 1803,418.25 1954.51,418.25 ; 1491.56,469 1597.73,469 1803,469 1954.51,469 ; 1491.56,519.75 1597.73,519.75 1803,519.75 1954.51,519.75 ; 1491.56,570.5 1597.73,570.5 1803,570.5 1954.51,570.5 ; 1491.56,621.26 1954.51,621.26 ; 1597.73,672.01 1597.73,-140.03 ; 1803,672.01 1803,-140.03 ; 1597.73,-140.03 1491.56,-140.03 1491.56,672.01 1954.51,672.01 1954.51,-140.03 1803,-140.03 ; 1597.73,-140.03 1803,-140.03
  text "OpenMV HD-GS-ALT-AR0135" at 386,677.7 h80
  text "Layer" at 1516.94,633.94 h25.38
  text "Name" at 1623.1,633.94 h25.38
  text "Thickness" at 1828.38,633.94 h25.38
  text "Top Overlay" at 1623.1,583.19 h25.38
  text "Top Solder" at 1623.1,532.44 h25.38
  text "0.010mm" at 1828.38,532.44 h25.38
  text "1" at 1516.94,481.69 h25.38
  text "Top" at 1623.1,481.69 h25.38
  text "0.035mm" at 1828.38,481.69 h25.38
  text "Dielectric 2" at 1623.1,430.94 h25.38
  text "0.127mm" at 1828.38,430.94 h25.38
  text "2" at 1516.91,380.18 h25.38
  text "2-GND" at 1623.08,380.18 h25.38
  text "0.035mm" at 1828.38,380.18 h25.38
  text "Dielectric 3" at 1623.1,329.43 h25.38
  text "0.254mm" at 1828.38,329.43 h25.38
  text "3" at 1516.94,278.68 h25.38
  text "3-SIG" at 1623.1,278.68 h25.38
  text "0.035mm" at 1828.38,278.68 h25.38
  text "Dielectric 1" at 1623.1,227.93 h25.38
  text "0.200mm" at 1828.38,227.93 h25.38
  text "4" at 1516.94,177.18 h25.38
  text "4-SIG" at 1623.1,177.18 h25.38
  text "0.035mm" at 1828.38,177.18 h25.38
  text "Dielectric 4" at 1623.1,126.42 h25.38
  text "0.254mm" at 1828.38,126.42 h25.38
  text "5" at 1516.94,75.67 h25.38
  text "5-GND" at 1623.1,75.67 h25.38
  text "0.035mm" at 1828.38,75.67 h25.38
  text "TG-170 or equivalent substrate  / Er = 4.3-4.5 @ 1MHz / +/- 10% /  / double side solder mask red / double side silkscreen white /  / 3 mil min trace width and / 3 mil min isolation /  / RoHS required" at 2073,27.11 h30
  text "Dielectric 5" at 1623.1,24.92 h25.38
  text "0.127mm" at 1828.38,24.92 h25.38
  text "6" at 1516.94,-25.83 h25.38
  text "Bottom" at 1623.1,-25.83 h25.38
  text "0.035mm" at 1828.38,-25.83 h25.38
  text "Bottom Solder" at 1623.1,-76.59 h25.38
  text "0.010mm" at 1828.38,-76.59 h25.38
  text "Bottom Overlay" at 1623.1,-127.34 h25.38